# Altium PCB IMU_standalone_v2.PcbDoc
Units mil, origin at the board's own origin, x right, y up, seen from the top; angles counter-clockwise.
Board outline 725 x 990 mil, 2 copper layers (Top Layer, Bottom Layer); 14 components, 12 nets, 65 pads, 8 vias.
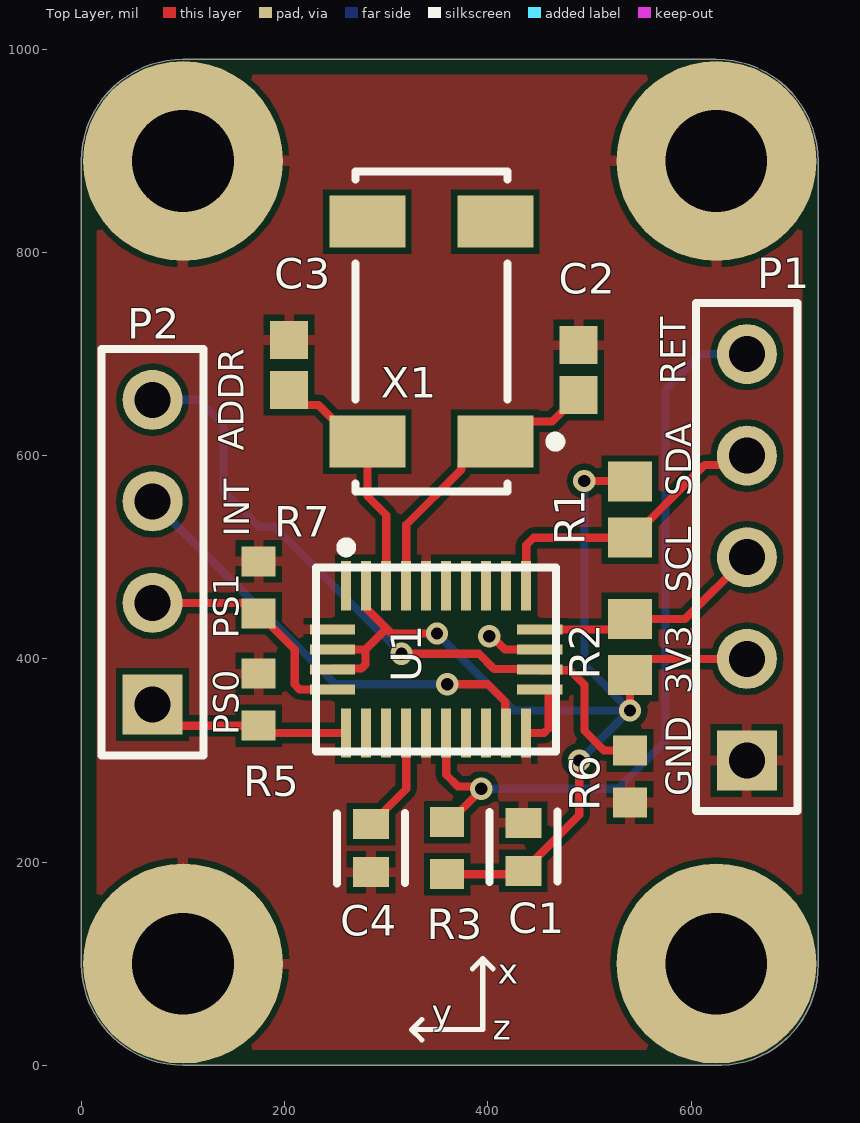
[diagram p0: Top Layer view]
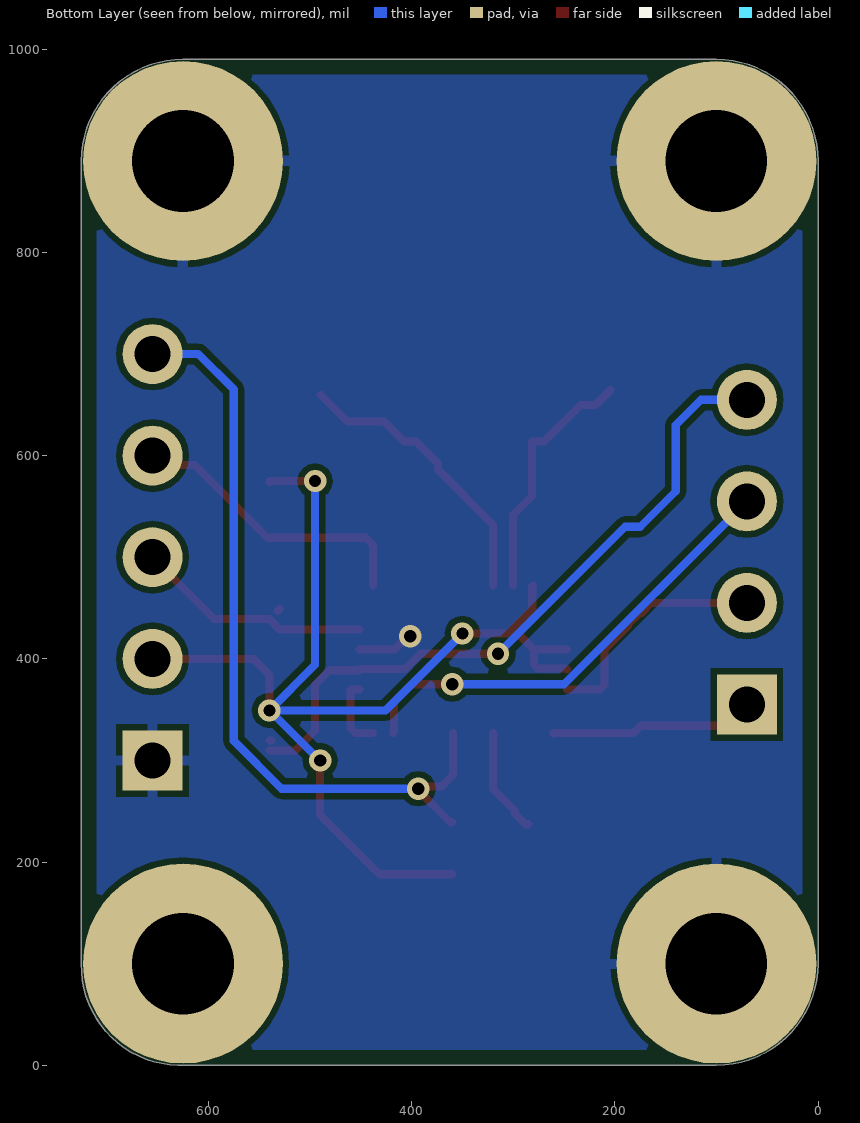
[diagram p1: Bottom Layer view, seen from below]
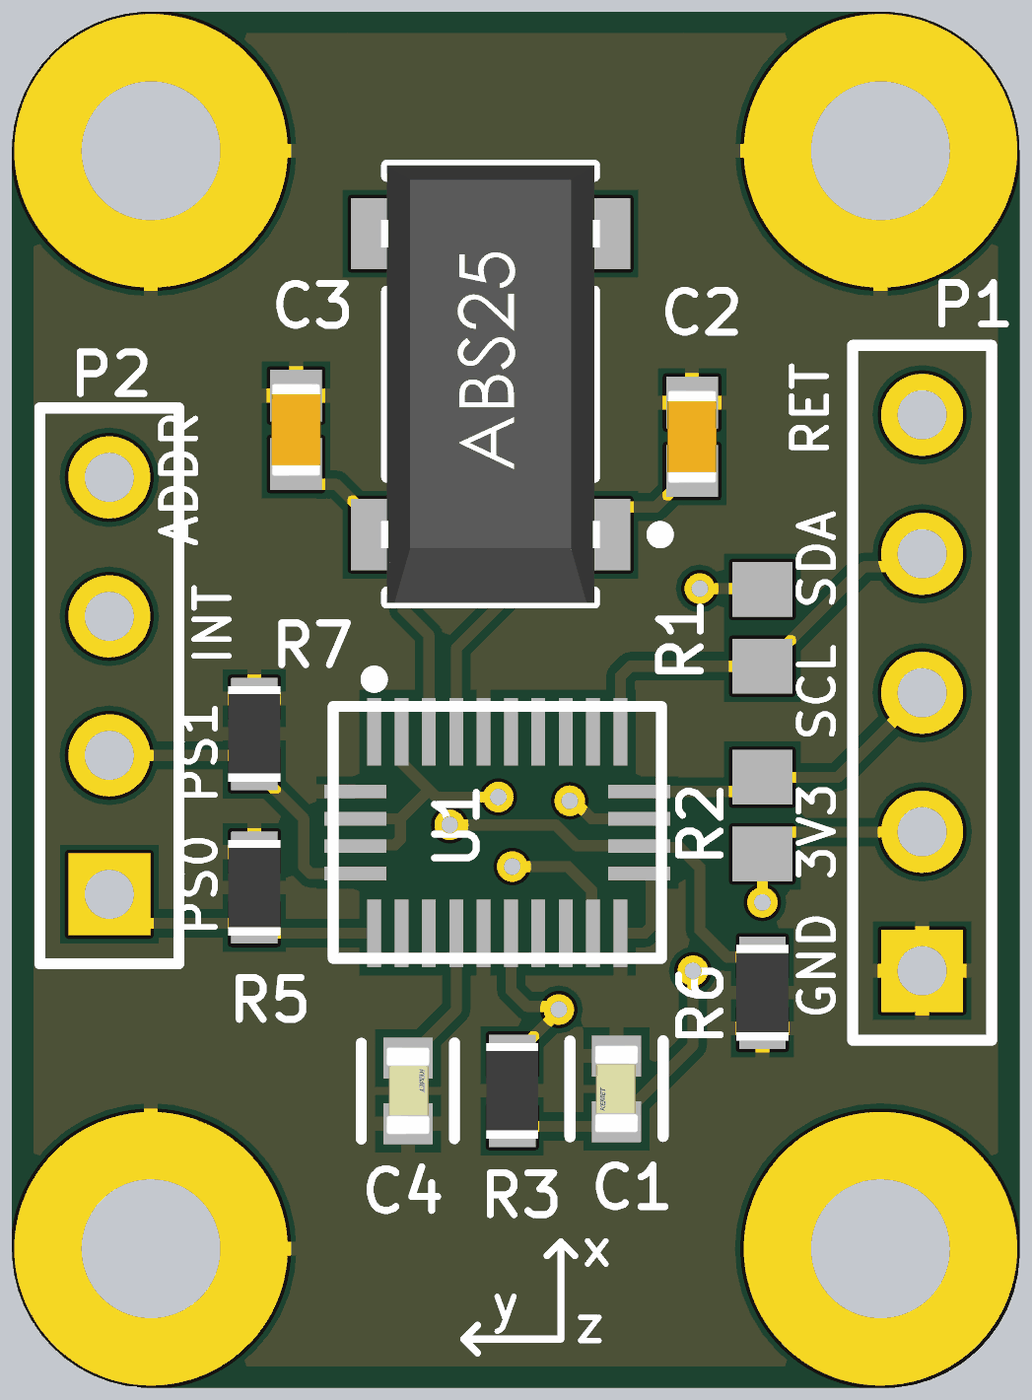
[diagram p2: 3D render of the assembled board from above, using the file's embedded part models]

## Layer stack, top to bottom
Top Solder: solder mask 0.4, Solder Resist, Dk 3.5
Top Layer: signal copper 1.4
Dielectric 1: dielectric 12.6, FR-4, Dk 4.8
Bottom Layer: signal copper 1.4
Bottom Solder: solder mask 0.4, Solder Resist, Dk 3.5

## Board outline
0,100 0,890 cw(c100,890) 100,990 625,990 cw(c625,890) 725,890 725,100 cw(c627.5,97.5) 630,0 100,0 cw(c100,100)

## Design rules (kind name [scope] priority, off if disabled: settings)
BoardOutlineClearance [All] p1: gap=15 ignorepadtopadclearanceinfootprint=FALSE
Clearance "Clearance Polygons" [InPolygon] p1: gap=6 ignorepadtopadclearanceinfootprint=FALSE except(0: Arc-Hole Track-Hole SMDPad-Hole THPad-Hole Via-Hole Fill-Hole Poly-Hole Region-Hole Text-Hole)
Clearance [All] p2: gap=5 ignorepadtopadclearanceinfootprint=FALSE except(0: Arc-Hole Track-Hole SMDPad-Hole THPad-Hole Via-Hole Fill-Hole Poly-Hole Region-Hole Text-Hole; 2: SMDPad-Via)
ComponentClearance "HM-TRP & UFL" [InComponent('X1') vs InComponent('U1')] p1: gap=0 collisioncheckmode=3 verticalgap=0 showdistances=FALSE
ComponentClearance [All] p2: gap=1 collisioncheckmode=3 verticalgap=1 showdistances=FALSE
DiffPairsRouting [All] p1: maxlimit=393.7 minlimit=5 mostfreqgap=8 toplayer_minwidth=5 toplayer_maxwidth=15 toplayer_prefwidth=8 bottomlayer_minwidth=5 bottomlayer_maxwidth=15 bottomlayer_prefwidth=8 maxuncoupledlength=500
HoleSize [All] p1: absolutevalues=TRUE maxlimit=265 minlimit=10 maxpercent=80.000 minpercent=20.000
HoleToHoleClearance [All] p1: gap=10 allowstackedmicrovias=FALSE
MinimumAnnularRing [All] p1: minimumring=4
MinimumSolderMaskSliver [All] p1: minsoldermaskwidth=0
PlaneClearance [All] p1: clearance=10
PlaneConnect [All] p1: planeconnectstyle=Relief reliefexpansion=4 reliefentries=4 reliefconductorwidth=6 reliefairgap=6
PolygonConnect "Via connect style" [isVia] p1: connectstyle=Direct reliefconductorwidth=10 reliefentries=4 polygonreliefangle="90 Angle" airgapwidth=10
PolygonConnect [All] p2: connectstyle=Relief reliefconductorwidth=10 reliefentries=4 polygonreliefangle="90 Angle" airgapwidth=6
RoutingCorners [All] p1: cornerstyle=45-Degree minsetback=49.21 maxsetback=49.21
RoutingVias [All] p1: holewidth=12 width=22 viastyle="Through Hole" minholewidth=10 minwidth=18 maxholewidth=100 maxwidth=114
SilkToSilkClearance [All] p1: silktosilkclearance=0
SilkToSolderMaskClearance [IsPad] p1: minsilkscreentomaskgap=5 clearancetoexposedcopper=TRUE
SolderMaskExpansion [All] p1: expansion=2.5 istentingtop=FALSE
Width [All] p1: maxlimit=400 minlimit=6 preferedwidth=8
20 further rules are at their usual default settings.

## Components (designator, comment, footprint, x,y, rotation, side; value= is the part's Value field where it differs from the comment)
C1 "C0603_0.1UF" FP-C0603C-CF-MFG 435,215 r90 top value="0.10 μF"
C2 "C0603_12PF" CAPC1608X90X40NL10T20 489.41,684.21 r270 top value=12pF
C3 "C0603_12PF" CAPC1608X90X40NL10T20 204.41,689.21 r270 top value=12pF
C4 "C0603_0.1UF" FP-C0603C-CF-MFG 285,213.62 r270 top value="0.10 μF"
P1 "Header 5" HDR1X5 655,300 r90 top
P2 "Header 4" HDR1X4 70,355 r90 top
R1 "R0603_2.4K" RESC1608X50X30ML20T20 540,546.77 r90 top value=2.4kR
R2 "R0603_2.4K" RESC1608X50X30ML20T20 540,411.65 r270 top value=2.4kR
R3 "R0603_10K" RESC1609X55X30LL15T15 360,213.62 r270 top value=10k
R5 "R0603_10K" RESC1609X55X30LL15T15 174.41,359.8 r270 top value=10k
R6 "R0603_10K" RESC1609X55X30LL15T15 540,284.21 r90 top value=10k
R7 "R0603_10K" RESC1609X55X30LL15T15 174.41,470.39 r270 top value=10k
U1 "BNO055" FP-BNO055-MFG 349.25,399.53 r90 top
X1 "ABS25-32.768KHZ-1-T" ABRA-ABS25-4_V 344.41,722.05 r90 top

## Footprints (in the part's own frame and the unit in brackets; to place one, negate y for a bottom-side part, rotate by r counter-clockwise, add the part's x,y. Pads: shape width x height; smd on the part's side, far side on the other; paste and mask are expansions set on the pad)
ABRA-ABS25-4_V [mm] "SMD, 4-Leads, Body 8x3.8mm, Pitch 5.5mm, Height 2.5mm"
  rect 1.3x1.9 smd: 1(-2.75,-1.6) 2(2.75,-1.6) 3(2.75,1.6) 4(-2.75,1.6)
  silkscreen extent -4,-3.22 4,1.9, body extent -4,-2 4,2, height 2.66
CAPC1608X90X40NL10T20 [mm] "Chip Capacitor, 2-Leads, Body 1.7x0.9mm, IPC Medium Density"
  rect 0.95x0.95 smd: 1(-0.625,0) 2(0.625,0)
  body extent -0.85,-0.45 0.85,0.45, height 0.9
FP-BNO055-MFG [mm]
  rect 1.234x0.25 smd paste+0 mask+0: 1(1.842,2.25) 6(-1.842,2.25) 7(-1.842,1.75) 8(-1.842,1.25) 9(-1.842,0.75) 10(-1.842,0.25) 11(-1.842,-0.25) 12(-1.842,-0.75) 13(-1.842,-1.25) 14(-1.842,-1.75) 15(-1.842,-2.25) 20(1.842,-2.25) 21(1.842,-1.75) 22(1.842,-1.25) 23(1.842,-0.75) 24(1.842,-0.25) 25(1.842,0.25) 26(1.842,0.75) 27(1.842,1.25) 28(1.842,1.75)
  rect 0.25x1.134 smd paste+0 mask+0: 2(0.75,2.592) 3(0.25,2.592) 4(-0.25,2.592) 5(-0.75,2.592) 16(-0.75,-2.592) 17(-0.25,-2.592) 18(0.25,-2.592) 19(0.75,-2.592)
  silkscreen extent -2.3,-3 2.92,3
FP-C0603C-CF-MFG [mm]
  rect 0.75x0.9 smd paste+0 mask+0: 1(-0.6,0) 2(0.6,0)
  silkscreen extent -0.87,-0.85 0.88,0.85, body extent -1.2,-0.6 1.2,0.6, height 0.25
HDR1X4 [mm] "Connector; Header; 4 Position"
  rect 1.5x1.5 hole 0.9: 1(0,0)
  round 1.5 hole 0.9: 2(2.54,0) 3(5.08,0) 4(7.62,0)
  silkscreen extent -1.27,-1.27 8.89,1.27
HDR1X5 [mm] "Connector; Header; 5 Position"
  rect 1.5x1.5 hole 0.9: 1(0,0)
  round 1.5 hole 0.9: 2(2.54,0) 3(5.08,0) 4(7.62,0) 5(10.16,0)
  silkscreen extent -1.27,-1.27 11.43,1.27
RESC1608X50X30ML20T20 [mm] "Chip Resistor, 2-Leads, Body 1.60x0.80mm, IPC Low Density"
  rect 1x1.1 smd: 1(-0.7,0) 2(0.7,0)
  body extent -0.9,-0.5 0.9,0.5, height 0.5
RESC1609X55X30LL15T15 [mm] "Chip Resistor, 2-Leads, Body 1.75x0.95mm, IPC High Density"
  rect 0.75x0.85 smd: 1(-0.65,0) 2(0.65,0)
  body extent -0.87,-0.48 0.87,0.48, height 0.55

## Part data
C1 C4: library part CMP-03020-016578-1, "CAP CER 0.1UF 16V X7R 0603", Capacitance="0.10 μF", Manufacturer=KEMET, Manufacturer Part Number=C0603C104M4RAC7411, Package=C0603C-CF, Temperature="-55°C to +125°C", Temperature Characteristic=X7R, Temperature Coefficient=30ppm/°C, Temperature Range High=+125°C, Temperature Range Low=-55°C, Tolerance=0.2, Voltage Rating="16 V", Automotive=Yes, Automotive Grade="Grade 1", Category=Cap, ComponentLink2Description=Datasheet, ComponentLink2URL=https://api.kemet.com/component-edge/download/datasheet/C0603C100J5GACAUTO.pdf, Device Class L1="Passive Components", Device Class L2=Capacitors, Device Class L3="Ceramic Capacitors", Digikey Description="CAP CER 0.1UF 16V X7R 0603", Height=0.87mm, Lead Free=Yes, Material=Ceramic, Mouser Description="Multilayer Ceramic Capacitors MLCC - SMD/SMT 16volts 0.1uF X7R 20%", Octopart=https://octopart.com/c0603c104m4rac7411-kemet-9138805, RoHS=TRUE
C2 C3: library part CMP-1659-00031-1, "Chip Capacitor, 12 pF, +/- 5%, 50 V, -55 to 125 degC, 0603 (1608 Metric), RoHS, Tape and Reel", Case\Package=Axial, Max Operating Temperature="155 degC", Min Operating Temperature="-55 degC", Package Quantity=200, Power Rating="250 mW", Resistance="475 kohm", Tolerance=1%, Voltage Rating="250 V", ComponentLink1Description="Manufacturer URL", ComponentLink1URL=http://www.yageo.com/, ComponentLink2Description=Datasheet, ComponentLink2URL=http://www.yageo.com/NewPortal/yageodocoutput?fileName=/pdf/MLCC/UPY-GP_NP0_16V-to-50V_14.pdf, DatasheetVersion="Rev. 14, 07/2016", Length="0.248 inch", Mount="Through Hole", PackageDescription="2-Pin Surface Mount Device, Body 1.6 x 0.8 mm", PackageReference=0603, Packaging=Bulk, RoHSCompliant=true
P1: "Header, 5-Pin", LatestRevisionDate=17-Jul-2002, LatestRevisionNote="Re-released for DXP Platform.", Publisher="Altium Limited"
P2: "Header, 4-Pin", LatestRevisionDate=17-Jul-2002, LatestRevisionNote="Re-released for DXP Platform.", Publisher="Altium Limited"
R1 R2: library part CMP-2000-02561-1, Manufacturer=Susumu, Part Number=RR0816P-242-D
R3 R5 R6 R7: library part CMP-2000-07452-1, "Chip Resistor, 10 KOhm, +/- 1%, 0.1 W, -55 to 155 degC, 0603 (1608 Metric), RoHS, Tape and Reel", Case Code (Imperial)=0603, Case Code (Metric)=1608, Manufacturer=Panasonic, Max Operating Temperature=155degC, Max Power Dissipation=100mW, Min Operating Temperature=-55degC, Package Description="2-Pin Surface Mount Device, Body 1.6 x 0.85 mm", Package Quantity=1, Package Reference=603, Resistance=10KOhm, Temperature Coefficient=100ppm\/degreesC, Tolerance=1%, Voltage Rating=75V, Case\/Package=0603, Composition=ThickFilm, Contact Plating=Tin, Datasheet URL=https://industrial.panasonic.com/cdbs/www-data/pdf/RDA0000/AOA0000C304.pdf, Datasheet Version=02/2017, Depth=0.8mm, Height=0.45mm, Lead Free=LeadFree, Length=1.6mm, Manufacturer URL=http://www.panasonic.com/, Military Standard=Not, Mount=SurfaceMount, Mounting Technology=SurfaceMount, Number of Pins=2, Number of Terminations=2, Packaging=TapeandReel, Power Rating=100mW, Radiation Hardening=No, REACH SVHC=NoSVHC, RoHSCompliant=true, Termination=SMD/SMT, Voltage Rating (DC)=75V, Width=0.031inch
U1: library part CMP-191067-000002-1, "IMU ACCEL/GYRO/MAG I2C 28LGA", Ambient Temperature Range High=+85°C, Ambient Temperature Range Low=-40°C, Manufacturer="Bosch Sensortech", Max Supply Voltage=3.6V, Min Supply Voltage=1.7V, Operating Supply Current=12.3mA, Package=0, Temperature="-40°C to +85°C", Voltage=1.7~3.6V, Accel Range=2/4/8/16g, Accel Resolution=14bits, Accel Sensitivity=0.001LSB/g, Automotive=No, Category=IC, ComponentLink2Description=Datasheet, ComponentLink2URL=https://ae-bst.resource.bosch.com/media/_tech/media/datasheets/BST-BNO055-DS000.pdf, Device Class L1=Sensors, Device Class L2="Motion Sensors", Device Class L3="Inertial Measurement Units (IMUs)", Digikey Description="IMU ACCEL/GYRO/MAG I2C 28LGA", Gyro Range=125/250/500/1000/2000°/s, Gyro Sensitivity=16LSB/°/s, Height=1.18mm, Lead Free=Yes, Mag Sense Range=1300-2500uT, Manufacturer Part Number=BNO055, Mouser Description="BNO055 Series 1.7 to 3.6 V Intelligent 9-Axis Absolute Orientation Sensor-LGA-28", Octopart=https://octopart.com/bno055-bosch+sensortec-50309911, RoHS=TRUE, Sensor Output=I2C,UART, Sensor Type=Accelerometer,Gyroscope,Magnetometer, Temperature Range High=+85°C, Temperature Range Low=-40°C
X1: library part CMP-2000-05736-1, "Low Frequency Crystal, 32.768 KHz, -40 to 85 degC, 4-Pin SMD, RoHS, Tape and Reel", Case Height=2.5mm, Case Length=8mm, Case Width=3.8mm, Frequency=32.768kHz, Load Capacitance=12.5pF, Manufacturer=ABRACON, Operating Temperature Range=-40Cto+85C, Package / Case=8mmx3.8mm, Package Description="4-Pin Surface Mount Device, Body 8 x 3.8 mm, Pitch 5.5 mm", Package Reference=ABS25, Tolerance=10PPM, Brand=ABRACON, Datasheet URL=http://www.abracon.com/Resonators/abs25.pdf, Datasheet Version=12/2015, Dimensions=3.8mmWx8mmLx2.5mmH, ESR=50kOhms, Factory Pack Quantity=3000, Manufacturer URL=http://www.abracon.com/, Mounting Style=SMD/SMT, Mounting Technology=SurfaceMount, Packaging=Reel, Product Category=Crystals, RoHS=Details, Series=ABS25, Termination Style=SMD/SMT, Type=LowFrequencyCrystal

## Free pads (board coordinates)
  round 196.85 hole 100: C1(100,890) C2(625,890) C3(100,100) C3(625,100)

## Via types
v1: diameter 22, hole 12, Top Layer to Bottom Layer, 8 vias

## Nets (pads, with @x,y where several pads share a name; then routed paths per layer and width w, separated by ;. In a path a pad name is that pad's centre, name@x,y a point inside that pad or via, vN(x,y) a via of type N, cw(c..) or ccw(c..) an arc to the next point about the centre after c; other vN are vias at no path point)
BNO055_INT: P2.3 U1.14 | length 460.1
  Top Layer w8: v1(360,375) 400,375 417.23,357.77 417.23,327.94 U1.14
  Bottom Layer w8: P2.3 250,375 v1(360,375)
BNO055_RESET: P1.5 R3.1 U1.11 | length 770.5
  Top Layer w8: U1.11 359.09,285.91 370.52,274.48 391.17,274.48 v1(393.52,272.14) 393.52,270.76 361.97,239.21 R3.1
  Bottom Layer w8: v1(393.52,272.14) 527.93,272.14 575,319.21 575,665 610,700 P1.5
GND: C1.2 C2.1 C3.1 C4.2 P1.1 pad.C1 pad.C2 pad.C3@100,100 R5.1 R6.1 R7.1 U1.2 U1.10 U1.15 U1.16 U1.18 U1.25 | length 125.9
  Top Layer w8: v1(401.33,422.29) 404.06,422.29 416.98,409.37 U1.18 ; U1.15 455.31,327.01 460,331.7 460,369.08 459.08,370 U1.16
I2C_ADDR: P2.4 R6.2 U1.17 | length 679.4
  Top Layer w8: v1(315,405) 391.28,405 406.28,390 450.98,390 U1.17 ; U1.17@451.29,388.77 480.76,388.77 495,374.53 495,329.21 514.41,309.8 R6.2 ; R6.2@538.03,319.8 R6.2@540,319.8
  Bottom Layer w8: P2.4 115.31,655 140,630.31 140,565 175,530 190,530 v1(315,405)
I2C_SCL: P1.3 R2.1 U1.19 | length 235.9
  Top Layer w8: U1.19 529.85,429.06 R2.1 594.21,439.21 P1.3 ; R2.1@530,449.21 R2.1@532.01,447.2
I2C_SDA: P1.4 R1.1 U1.20 | length 293.6
  Top Layer w8: U1.20 437.83,512.05 445,519.21 R1.1 541.97,519.21 613.47,590.72 645.72,590.72 P1.4
NetC4_1: C4.1 U1.9 | length 106.6
  Top Layer w8: C4.1 287.95,237.24 298.72,248.01 298.72,250.96 319.72,271.97 319.72,325.17 318.8,326.09 U1.9
PS0: P2.1 R5.2 U1.6 | length 203.6
  Top Layer w8: P2.1 90.79,334.21 R5.2 181.61,327.01 U1.6 U1.6@259.75,326.09
PS1: P2.2 R7.2 U1.5 | length 234.1
  Top Layer w8: P2.2 164.21,455 R7.2 176.38,444.8 187.14,434.04 187.14,432.07 210,409.21 210,374.69 214.69,370 U1.5 U1.5@247.01,369.8
VCC: C1.1 P1.2 R1.2 R2.2 R3.2 U1.3 U1.4 U1.28 | length 1158.3
  Top Layer w8: U1.4 248.13,390.61 275.76,390.61 279.52,394.37 279.52,409.37 ; U1.3 279.52,409.37 ; U1.28 281.28,471.13 281.28,448.87 300.15,430 ; v1(350,425) 305.15,425 300.15,430 ; R3.2 431.65,188.03 C1.1 490,246.38 v1(490,300) ; v1(495,575) 539.33,575 R1.2 ; v1(540,349.21) R2.2 555.69,399.78 654.78,399.78 P1.2 ; 279.52,409.37 300.15,430
  Bottom Layer w8: v1(350,425) 425.79,349.21 v1@539.61,349.21 ; v1(490,300) 490.39,300 v1@539.61,349.21 ; v1(495,575) 495,394.21 v1(540,349.21) v1@539.61,349.21
XIN32: C3.2 U1.27 X1.4 | length 247.5
  Top Layer w8: C3.2 219.11,649.91 233.48,649.91 269.61,613.78 X1.4 281.42,560.04 300.04,541.42 U1.27
XOUT32: C2.2 U1.26 X1.1 | length 286
  Top Layer w8: U1.26 319.72,532.01 374,586.28 374,592.19 395.59,613.78 X1.1 427.21,633.59 463.39,633.59 C2.2
pads on no net: U1.1 U1.7 U1.8 U1.12 U1.13 U1.21 U1.22 U1.23 U1.24 X1.2 X1.3

## Polygon pours and split planes (outlines as drawn)
GND on Top Layer "GND_L01_P000" (solid, pour order 0): 0,990 730,990 730,-10 720,0 0,0
GND on Bottom Layer "GND_L02_P002" (solid, pour order 2): 0,990 730,990 725,985 725,-5 5,-5 0,0
no net on Bottom Layer "NONET_L02_P001" (solid, pour order 1): 0,990

## Silkscreen, mask and mechanical layers (free items; w line width, h text height)
Top Overlay:
  lines w5: 335,25 325,35 ; 335,45 325,35 ; 385,95 395,105 ; 405,95 395,105 ; 325,35 395,35 395,105
  text "RET" at 595,670 h25 r90
  text "ADDR" at 160,605 h25 r90
  text "SDA" at 600,560 h25 r90
  text "INT" at 165,520 h25 r90
  text "SCL" at 600,465 h25 r90
  text "PS1" at 155,420 h25 r90
  text "3V3" at 600,365 h25 r90
  text "PS0" at 155,325 h25 r90
  text "GND" at 600,265 h25 r90
  text "x" at 410,80 h25
  text "y" at 345,40 h25
  text "z" at 405,25 h25
Mechanical 1:
  the board outline again, w10